# Altium PCB PCB1.PcbDoc
Units mil, origin at the board's own origin, x right, y up, seen from the top; angles counter-clockwise.
Board outline 6000 x 4000 mil, 2 copper layers (Top Layer, Bottom Layer); 46 components, 28 nets, 122 pads, 0 vias.
Unrouted connection lines stored in the file: 2.
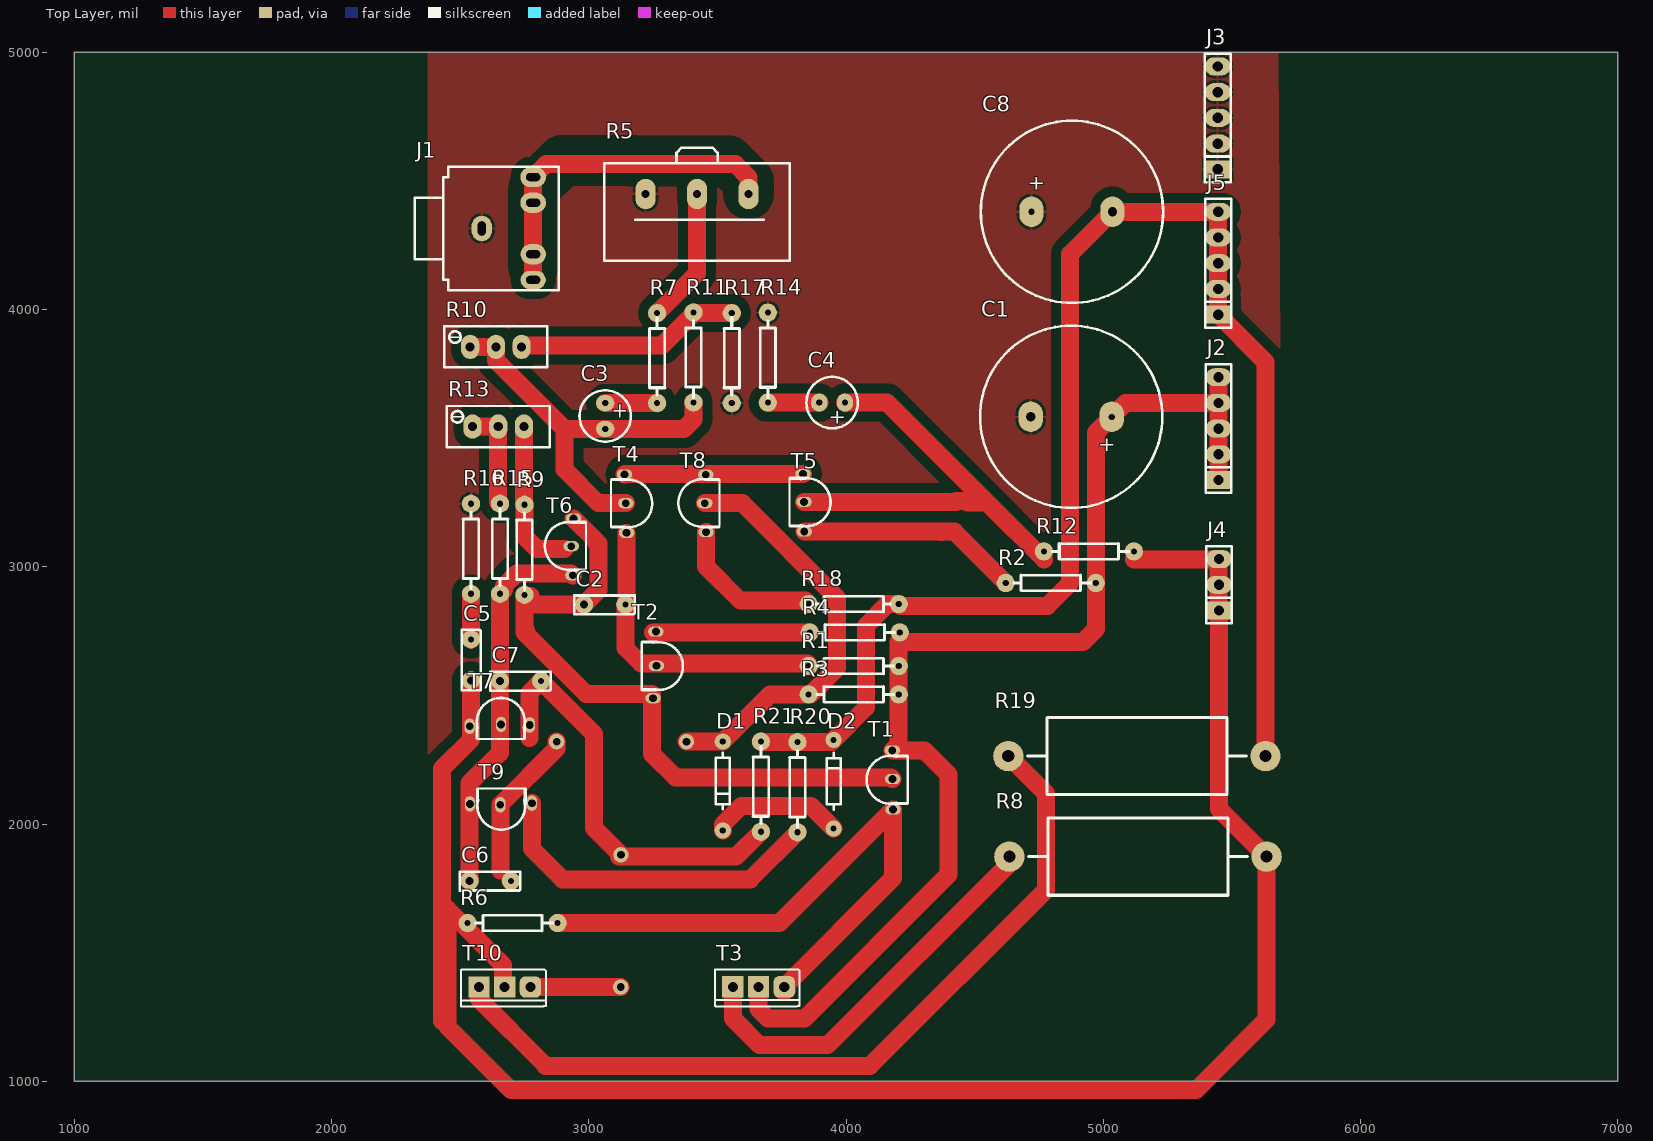
[diagram p0: Top Layer view]
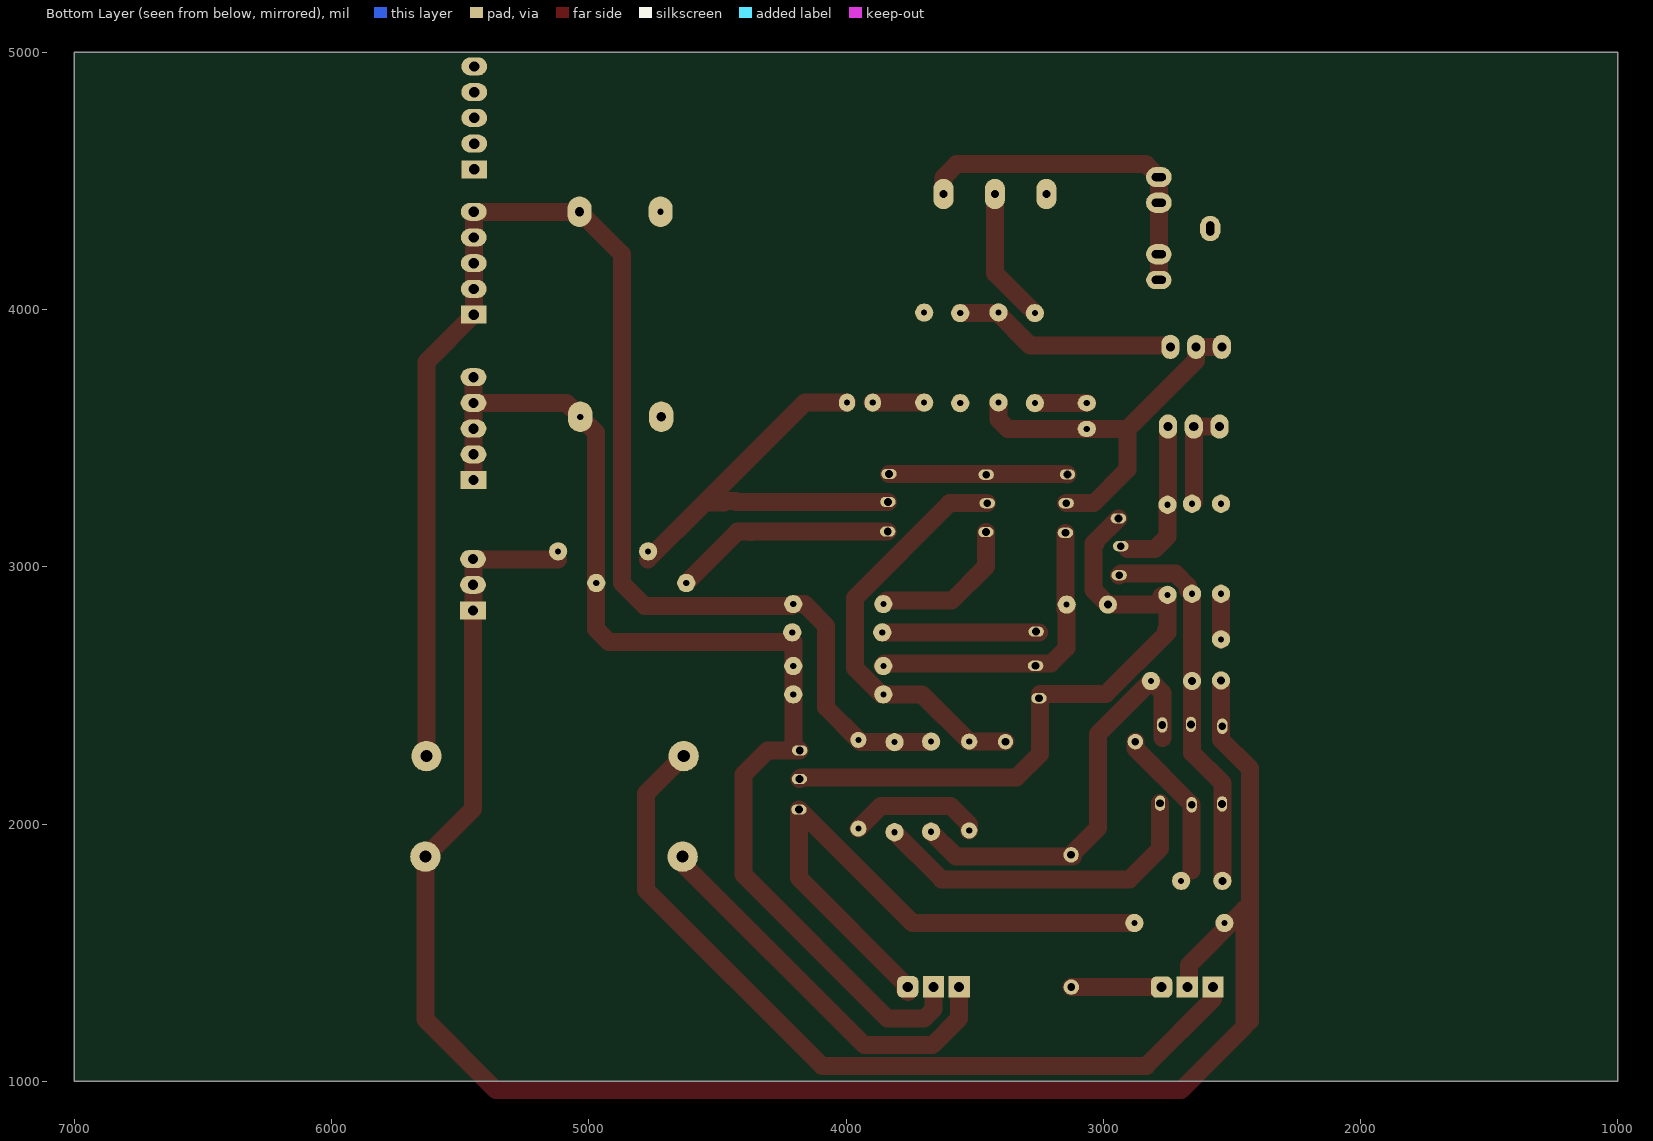
[diagram p1: Bottom Layer view, seen from below]

## Layer stack, top to bottom
Top Solder: solder mask 0.4, Solder Resist, Dk 3.5
Top Layer: signal copper 1.4
Dielectric 1: dielectric 12.6, FR-4, Dk 4.8
Bottom Layer: signal copper 1.4
Bottom Solder: solder mask 0.4, Solder Resist, Dk 3.5

## Board outline
1000,1000 7000,1000 7000,5000 1000,5000

## Design rules (kind name [scope] priority, off if disabled: settings)
Clearance [All] p1: gap=5
PolygonConnect [All] p1: connectstyle=Relief reliefconductorwidth=10 reliefentries=4 polygonreliefangle="90 Angle" airgapwidth=10
RoutingVias [All] p1: holewidth=28 width=50 viastyle="Through Hole" minholewidth=28 minwidth=50 maxholewidth=28 maxwidth=50
SolderMaskExpansion [All] p1: expansion=4
Width [All] p1: maxlimit=70 minlimit=70 preferedwidth=70 minimp=50.000000 maximp=50.000000 favimp=50.000000
29 further rules are at their usual default settings.

## Components (designator, comment, footprint, x,y, rotation, side; value= is the part's Value field where it differs from the comment)
C1 "3300" C18 5033,3583 r180 top
C2 "121" CAP2 2982,2853 r0 top
C3 "10uf" CAO2 3064,3586 r270 top
C4 "CAP3" CAO2 3946,3638 r180 top
C5 "333" CAP2 2542,2558 r90 top
C6 "121" CAP2 2537,1779 r0 top
C7 "121" CAP2 2655,2556 r0 top
C8 "3300" C18 4721,4380 r0 top
D1 "DIODE" DIODE0.2#1 3521,2305 r270 top
D2 "DIODE" DIODE0.2#2 3952,2028 r90 top
J1 "IN" SOUND1 2584,4315 r270 top
J2 "CON5" sip-5 5448,3337 r90 top
J3 "CON5" sip-5 5445,4545 r90 top
J4 "CON3" sip-3 5450,2830 r90 top
J5 "CON5" sip-5 5447,3980 r90 top
R1 "2.2k" AXIAL0.3 3855,2614 r0 top
R2 "2.2k" AXIAL0.3 4621,2937 r0 top
R3 "10k" AXIAL0.3 3855,2504 r0 top
R4 "150" AXIAL0.3 3859,2745 r0 top
R5 "RPOT-1" RVR-A 3621,4449 r180 top
R6 "220" AXIAL0.3 2529,1615 r0 top
R7 "1k" AXIAL0.3 3266,3636 r90 top
R8 "220" AXIAL1.0 5635,1873 r180 top
R9 "8k" AXIAL0.3 2750,3241 r270 top
R10 "50k" RVR-4 2539,3855 r180 top
R11 "10k" AXIAL0.3 3407,3989 r270 top
R12 "56k" AXIAL0.3 4769,3060 r0 top
R13 "50k" RVR-4 2548,3545 r180 top
R14 "1k" AXIAL0.3 3696,3988 r270 top
R15 "1k" AXIAL0.3 2655,2895 r90 top
R16 "10" AXIAL0.3 2542,3245 r270 top
R17 "47k" AXIAL0.3 3556,3636 r90 top
R18 "620" AXIAL0.3 4205,2855 r180 top
R19 "220" AXIAL1.0 5631,2264 r180 top
R20 "150" AXIAL0.3 3811,2318 r270 top
R21 "220" AXIAL0.3 3669,1970 r90 top
T1 "2N5551" TO-92#1 4183,2121 r270 top
T2 "2N5401" TO-92#2 3263,2665 r90 top
T3 "TIP41" TO-220 3805,1410 r180 top
T4 "2N5551" TO-92#3 3144,3297 r90 top
T5 "2N5551" TO-92#4 3837,3302 r90 top
T6 "2N5551" TO-92#5 2932,3030 r270 top
T7 "2N5401" TO-92#6 2607,2387 r180 top
T8 "2N5551" TO-92#7 3451,3197 r270 top
T9 "2N5551" TO-92#8 2711,2081 r0 top
T10 "TIP41" TO-220 2818,1409 r180 top

## Footprints (in the part's own frame and the unit in brackets; to place one, negate y for a bottom-side part, rotate by r counter-clockwise, add the part's x,y. Pads: shape width x height; smd on the part's side, far side on the other; paste and mask are expansions set on the pad)
AXIAL0.3 [mm]
  round 1.8 hole 0.6: 1(0,0) 2(8.89,0)
  silkscreen extent 0.81,-0.76 8.43,0.76
AXIAL1.0 [mm]
  round 3 hole 1.2: 1(0,0) 2(25.4,0)
  silkscreen extent 1.91,-3.81 23.49,3.81
C18 [mm]
  oval 2.4x3 hole 0.6: 1(0,0)
  oval 2.4x3 hole 0.9: 2(8,0)
  silkscreen extent -5,-9 13,9
CAO2 [mm]
  oval 1.6x1.8 hole 0.6: 1(-1.27,0) 2(1.27,0)
  silkscreen extent -2.54,-2.54 2.54,2.54
CAP2 [mm]
  round 1.8 hole 0.8: 1(0,0)
  round 1.8 hole 0.6: 2(4.064,0)
  silkscreen extent -0.98,-0.95 4.99,0.9
DIODE0.2#1 [mm]
  round 1.6 hole 0.6: 1(-0.381,0) 2(8.382,0)
  silkscreen extent 0.71,-0.7 6.3,0.7
DIODE0.2#2 [mm]
  round 1.6 hole 0.6: 1(-1.168,0) 2(7.595,0)
  silkscreen extent 0.71,-0.7 6.3,0.7
RVR-4 [mm]
  oval 1.8x2.4 hole 0.9: 1(0,0) 2(-2.54,0) 3(-5.08,0)
  silkscreen extent -7.62,-2.03 2.54,2.03
RVR-A [mm]
  oval 2x3 hole 0.8: 1(0,0) 2(5.08,0) 3(10.16,0)
  silkscreen extent -4.06,-4.57 14.22,6.6
sip-3 [mil]
  rect 70x100 hole 40: 1(0,0)
  oval 70x100 hole 40: 2(100,0) 3(200,0)
  silkscreen extent -50,-50 250,50
sip-5 [mil]
  rect 70x100 hole 40: 1(0,0)
  oval 70x100 hole 40: 2(100,0) 3(200,0) 4(300,0) 5(400,0)
  silkscreen extent -50,-50 450,50
SOUND1 [mm]
  oval 2x2.54 hole 0.8 slot 1.4 at 90 deg: 1(-5.08,5.08) 2(-2.54,5.08)
  oval 2x2.5 hole 0.8 slot 1.4 at 90 deg: 3(2.54,5.08)
  oval 1.8x2.5 hole 0.8 slot 1.4 at 90 deg: 4(5.08,5.08)
  oval 2.5x2 hole 0.8 slot 1.4 at 0 deg: 5(0,0)
  silkscreen extent -6.1,-6.6 6.1,7.62
TO-92#1 [mil]
  oval 40x60 hole 30: 1(65,0) 2(-54,-2) 3(-165,-3)
  silkscreen extent -144,-103 42,57
TO-92#2 [mil]
  oval 40x60 hole 30: 1(83,2) 2(-50,0) 3(-176,13)
  silkscreen extent -144,-103 42,57
TO-92#3 [mil]
  oval 40x60 hole 30: 1(62,5) 2(-50,0) 3(-165,-3)
  silkscreen extent -144,-103 42,57
TO-92#4 [mil]
  oval 40x60 hole 30: 1(59,4) 2(-50,0) 3(-165,-1)
  silkscreen extent -144,-103 42,57
TO-92#5 [mil]
  oval 40x60 hole 30: 1(63,6) 2(-50,0) 3(-158,9)
  silkscreen extent -144,-103 42,57
TO-92#6 [mil]
  oval 40x60 hole 30: 1(70,7) 2(-52,0) 3(-164,2)
  silkscreen extent -144,-103 42,57
TO-92#7 [mil]
  oval 40x60 hole 30: 1(62,5) 2(-50,0) 3(-161,4)
  silkscreen extent -144,-103 42,57
TO-92#8 [mil]
  oval 40x60 hole 30: 1(68,0) 2(-55,-6) 3(-173,-3)
  silkscreen extent -144,-103 42,57
TO-220 [mm] "整流管"
  rrect50% 2.1x2.1 hole 1: 1(1.143,1.092)
  rect 2.1x2.1 hole 1: 2(3.683,1.092) 3(6.223,1.092)
  silkscreen extent -0.38,-0.64 8,3.02

## Part data
C1 C3 C8: library part CAP3
C2 C5 C6 C7: library part CAP1
J1: library part "PHONEJACK ST"
J2 J3 J4 J5: "Connector"
R1 R2 R3 R4 R6 R7 R8 R9 R11 R12 R14 R15 R16 R17 R18 R19 R20 R21: library part RES
R5: "Potentiometer"
R10 R13: library part RPOT-1, "Potentiometer"
T1 T4 T5 T6 T8 T9: "NPN,小功率"
T2 T7: "PNP,小功率"
T3 T10: "NPN PLASTIC POWER TRANSISTORS"

## Free pads (board coordinates)
  round 60 hole 30: 0(3125,1880) 1(3124,1366) 2(3380,2320) 3(2875,2320)

## Nets (pads, with @x,y where several pads share a name; then routed paths per layer and width w, separated by ;. In a path a pad name is that pad's centre, name@x,y a point inside that pad or via, vN(x,y) a via of type N, cw(c..) or ccw(c..) an arc to the next point about the centre after c; other vN are vias at no path point)
12: C5.1 J4.1 J4.2 J4.3 R6.1 R8.1 R12.2 T7.1 T10.2 | length 7818.1
  Top Layer w70: 2429.5,1233.5 2429.5,2215.5 2543,2329 2543,2336 ; 2542,2337 C5.1 ; T10.2 2666.66,1372.34 2666.66,1452.34 2450,1669 2450,1213 2698,965 5360,965 5635,1240 R8.1 5450,2058 J4.1 ; R12.2@5119,3029 5449,3029 J4.1@5449,2831
+18: C1.1 J2.1 J2.2 J2.3 J2.4 J2.5 R1.2 R2.2 R3.2 R4.2 T1.3 T3.2 | length 4626.5
  Top Layer w70: T3.2 3660,1280 3697,1243 3838,1243 4398,1803 4398,2193 4305,2286 T1.3 4205,2311 R3.2 ; R3.2@4204,2505 4204,2707 4922,2707 4972.57,2757.57 4972.57,3522.57 C1.1 5087,3637 J2.4 ; J2.1 J2.2 J2.3 J2.4 ; J2.5 J2.4
-18: C8.2 D2.2 J5.1 J5.2 J5.3 J5.4 J5.5 R18.1 R19.1 R20.1 R21.2 | length 5766.3
  Top Layer w70: R21.2 3671,2318 R20.1 3943,2318 D2.2 4077,2452 4077,2770 4162,2855 R18.1 4211.73,2848.27 4783.27,2848.27 4871,2936 4871,4215.04 C8.2 J5.5 J5.4 J5.3 J5.2 J5.1 5631,3796 R19.1
GND: C1.2 C8.1 J1.5 J3.1 J3.2 J3.3 J3.4 J3.5 R5.3 R14.1 R16.1 R17.1
NetC2_1: C2.1 R9.2 T1.2 T2.3 T6.3 | length 2586.8
  Top Layer w70: 2750,2745 2990,2505 3246,2505 3246,2272.5 3338,2180.5 4175.5,2180.5 T1.2 ; 2756.5,2751.5 2750,2758 R9.2 2754,2887 R9.2@2773,2887 ; R9.2@2769.57,2874 2790.57,2853 C2.1 3038,2909 3038,3091 ; T6.3 3031,3098 3031,3091
NetC2_2: C2.2 R1.1 T2.2 T4.3 | length 1222.5
  Top Layer w70: C2.2 C2.2@3142,2826 ; T4.3 3147,2831 C2.2@3142,2826 ; R1.1@3859,2614 3850,2623 3204,2623 3142,2685 C2.2@3142,2826
NetC3_1: C3.1 R7.1 | length 202
  Top Layer w70: C3.1 R7.1
NetC3_2: C3.2 R10.1 R10.2 R11.2 T4.2 | length 1563.2
  Top Layer w70: R10.1 R10.2 2639,3802 2905,3536 ; T4.2 3037,3247 2905,3379 2905,3536 ; R11.2 3407,3573 3370,3536 C3.2 2905,3536
NetC4_1: C4.1 R12.1 T5.2 | length 1736.3
  Top Layer w70: T5.2 4428,3252 ; C4.1 4160,3638 4548,3250 ; 4428,3256 4472,3256 ; 4472,3250 4548,3250 ; R12.1@4769,3029 4548,3250
NetC4_2: C4.2 R14.2 | length 200
  Top Layer w70: R14.2 C4.2
NetC5_2: C5.2 R16.2 | length 177
  Top Layer w70: C5.2 R16.2
NetC6_1: C6.1 C7.1 R15.1 T6.1 T7.2 T9.3 | length 1490.7
  Top Layer w70: C6.1 2537,2159 2654,2276 2654,2338 ; 2655,2339 C7.1 R15.1 2669.57,2909.57 2669.57,2924.32 2719.25,2974 2931,2974 T6.1
NetC6_2: C6.2 D1.1 pad.2 pad.3 R3.1 T8.2 T9.2 | length 2233.1
  Top Layer w70: 2656,1820 T9.2 2875,2294 pad.3 ; pad.2 D1.1 3705,2504 R3.1 3862.14,2504 3965,2606.86 3965,2879 3597,3247 T8.2
NetC7_2: C7.2 pad.0 pad.1 R21.1 T7.3 T10.1 | length 1987.6
  Top Layer w70: 2769,2335 2769,2510 C7.2 3021,2350 3021,1984 pad.0 ; T10.1 pad.1 ; pad.0@3117,1873 3572,1873 R21.1
NetD1_2: D1.2 D2.1 | length 520.3
  Top Layer w70: D1.2 3521,1998 3593,2070 3864,2070 D2.1
NetJ1_1: J1.1 J1.2 J1.3 J1.4 R5.1 | length 1343.8
  Top Layer w70: J1.4 J1.3 J1.2 J1.1 2834,4565 3570,4565 3621,4514 R5.1
NetR2_1: R2.1 T5.3 | length 869
  Top Layer w70: T5.3 4421,3137 R2.1@4619,2939 ; 4367,3135 4373,3135
NetR4_1: R4.1 T2.1 | length 609
  Top Layer w70: T2.1@3250,2745 R4.1
NetR5_2: R5.2 R7.2 | length 527.2
  Top Layer w70: R7.2 3421,4141 R5.2
NetR6_2: R6.2 T1.1 T3.1 | length 2366.4
  Top Layer w70: R6.2 3742,1615 T1.1 4183,1790 T3.1 ; T3.1@3759,1346 T3.1@3770,1357
NetR8_2: R8.2 T3.3 | length 1533.9
  Top Layer w70: T3.3 3560,1244 3664,1140 3928,1140 R8.2@4635,1847
NetR9_1: R9.1 R13.3 T6.2 | length 601.2
  Top Layer w70: R9.1@2748,3243 R13.3 ; R9.1 2750,3118 2799,3069 T6.2@2905.86,3069
NetR10_3: R10.3 R11.1 R17.2 | length 871.3
  Top Layer w70: R10.3 2744,3860 3284,3860 3410,3986 R17.2
NetR13_1: R13.1 R13.2 R15.2 | length 402.9
  Top Layer w70: R13.1 R13.2 2648,3252 R15.2
NetR18_2: R18.2 T8.1 | length 575.1
  Top Layer w70: T8.1 3456,3001 3589,2868 R18.2@3842,2868
NetR19_2: R19.2 T10.3 | length 3221.7
  Top Layer w70: T10.3 2573,1319.68 2832.68,1060 4093,1060 4777,1744 4777,2118 R19.2
NetR20_2: R20.2 T9.1 | length 1334.1
  Top Layer w70: T9.1 2779,1904 2898,1785 3628,1785 R20.2
NetT4_1: T4.1 T5.1 T8.3 | length 694
  Top Layer w70: T4.1 T4.1@3141,3359 ; T4.1@3141,3361 T5.1

## Polygon pours and split planes (outlines as drawn)
GND on Top Layer "Bottom Layer-No Net" (solid, remove dead copper, pour order 3): 5706,905 5698,913 2374,913 2374,5004 2361,5017 2378,5000 5672,5000 5677,5000 5681,4996

## Silkscreen, mask and mechanical layers (free items; w line width, h text height)
Mechanical 13:
  text "c" at 2679,1509 h60
  text "b" at 3763,1464 h60
  text "c" at 3656,1458 h60
  text "b" at 2770,1438 h60
  text "e" at 3419,1332 h60
  text "e" at 2512,1217 h60

## Text inside footprints (layer, text, board x,y; h text height)
C1: Top Overlay "+" at 5047.76,3497.37 h60 r180
C3: Top Overlay "+" at 3097.47,3640.13 h60 r270
C4: Top Overlay "+" at 4000.13,3604.53 h60 r180
C8: Top Overlay "+" at 4706.24,4465.63 h60